# Altium PCB PCB.PcbDoc
Units mil, origin at the board's own origin, x right, y up, seen from the top; angles counter-clockwise.
Board outline 2657.48 x 2066.93 mil, 2 copper layers (Top Layer, Bottom Layer); 47 components, 21 nets, 148 pads, 57 vias.
Unrouted connection lines stored in the file: 1.
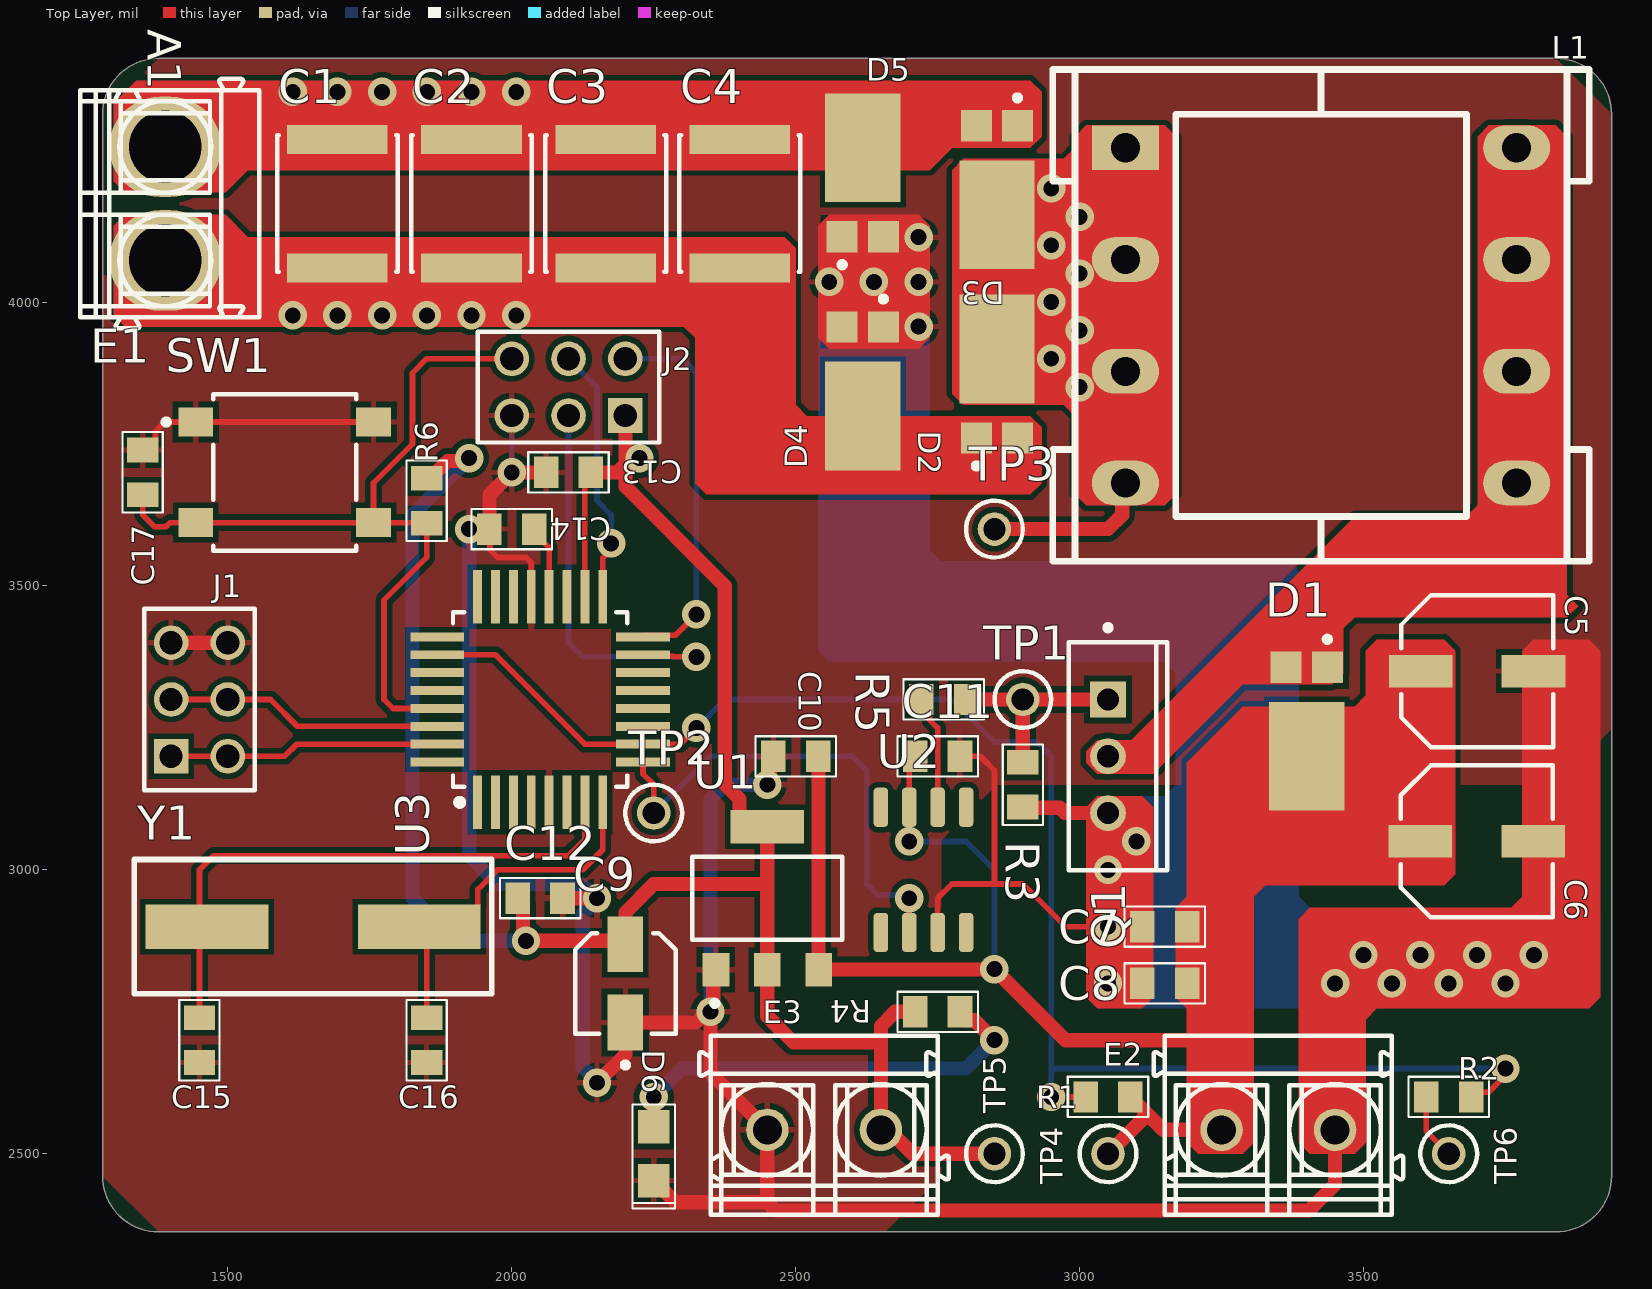
[diagram p0: Top Layer view]
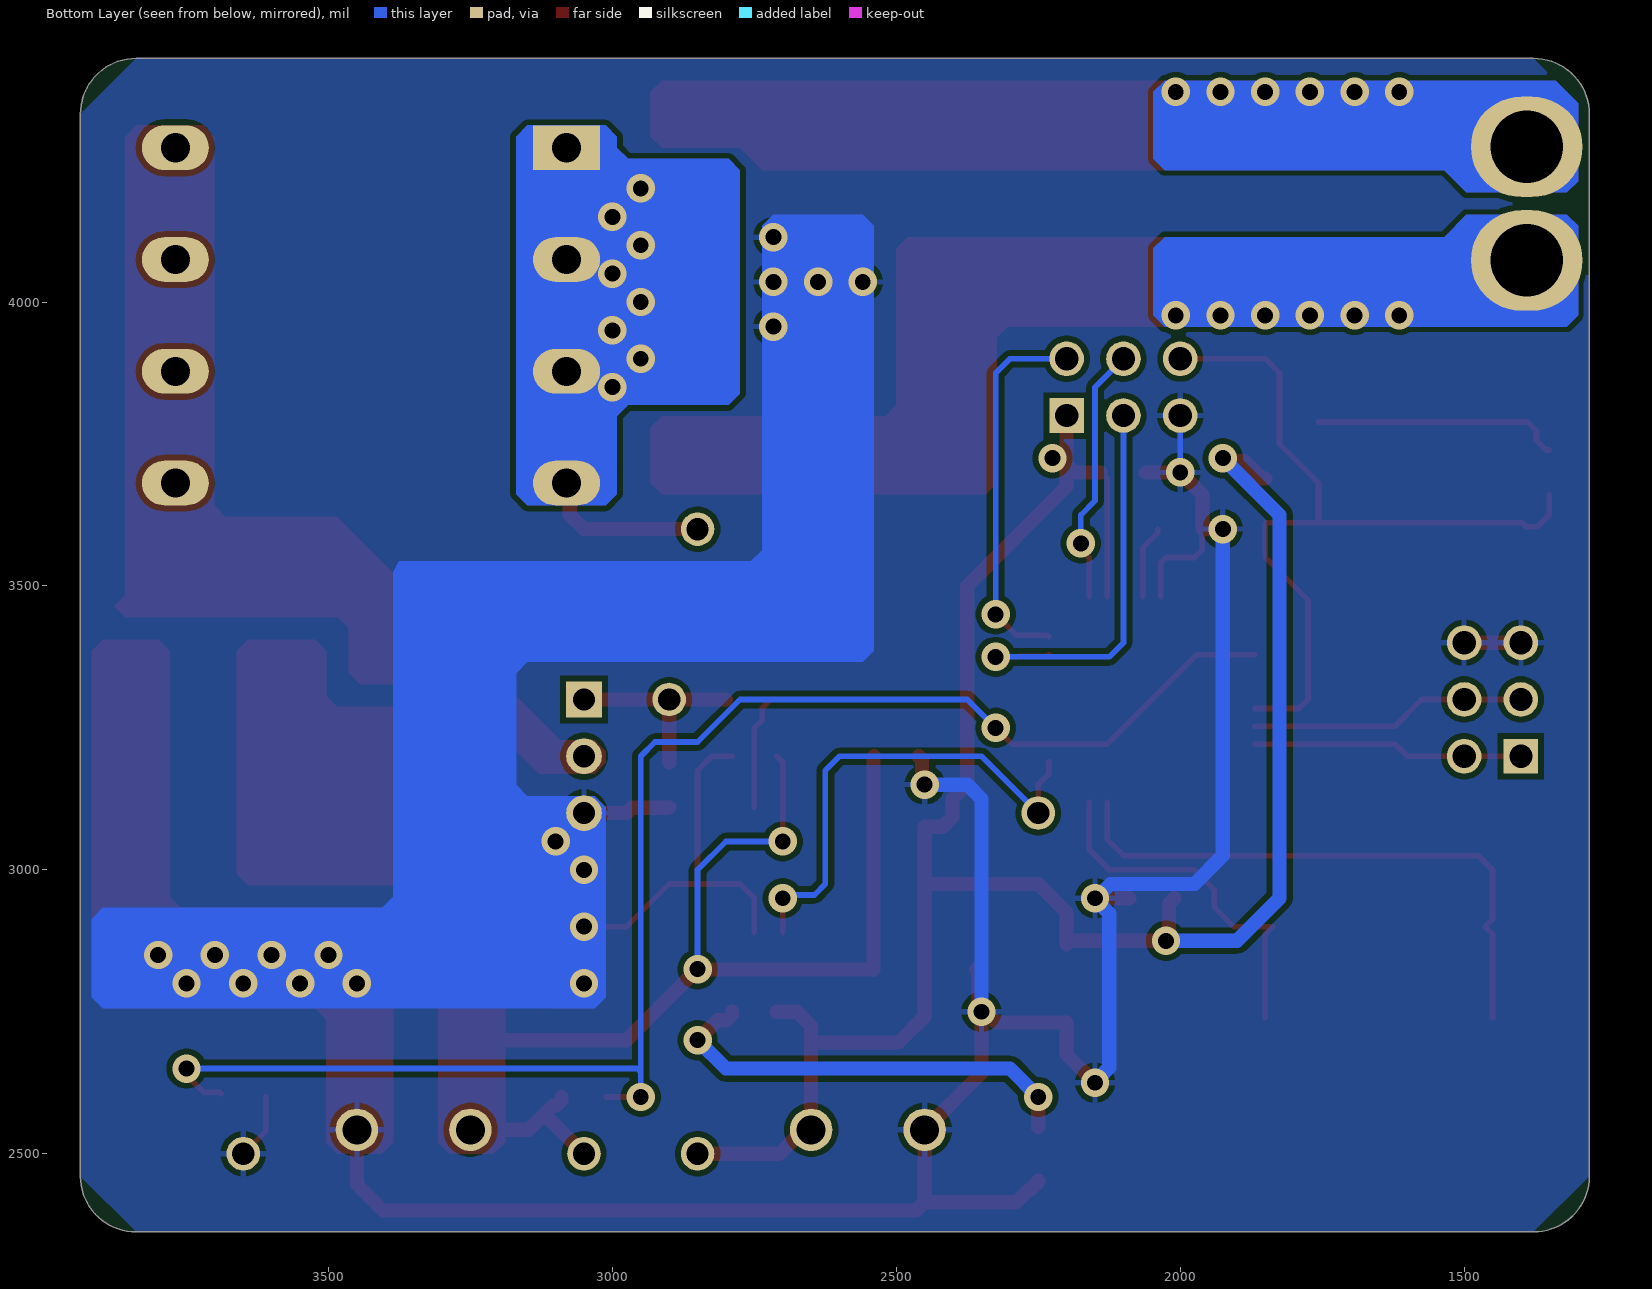
[diagram p1: Bottom Layer view, seen from below]

## Layer stack, top to bottom
Top Solder: solder mask 0.4, Solder Resist, Dk 3.5
Top Layer: signal copper 1.4
Dielectric 1: dielectric 12.6, FR-4, Dk 4.8
Bottom Layer: signal copper 1.4
Bottom Solder: solder mask 0.4, Solder Resist, Dk 3.5

## Board outline
1377.95,2362.2 cw(c1377.95,2460.63) 1279.53,2460.63 1279.53,4330.71 cw(c1377.95,4330.71) 1377.95,4429.13 3838.58,4429.13 cw(c3838.58,4330.71) 3937.01,4330.71 3937.01,2460.63 cw(c3838.58,2460.63) 3838.58,2362.2

## Design rules (kind name [scope] priority, off if disabled: settings)
Clearance [All] p1: gap=10 ignorepadtopadclearanceinfootprint=FALSE except(0: Arc-Hole Track-Hole SMDPad-Hole THPad-Hole Via-Hole Fill-Hole Poly-Hole Region-Hole Text-Hole)
HoleSize [All] p1: absolutevalues=TRUE maxlimit=1000 minlimit=1 maxpercent=80.000 minpercent=20.000
PlaneClearance [All] p1: clearance=50
PolygonConnect [All] p1: connectstyle=Relief reliefconductorwidth=10 reliefentries=4 polygonreliefangle="90 Angle" airgapwidth=10
RoutingVias [All] p1: holewidth=28 width=50 viastyle="Through Hole" minholewidth=28 minwidth=50 maxholewidth=28 maxwidth=50
SolderMaskExpansion [All] p1: expansion=4 istentingtop=FALSE
Width [All] p1: maxlimit=100 minlimit=8 preferedwidth=10 minimp=50.000000 maximp=50.000000 favimp=50.000000
28 further rules are at their usual default settings.

## Classes and differential pairs
component class P_IN: C1 C2 C3 C4 C5 C6 C7 C8 C9 C10 C11 D1 D2 D3 D4 D5 D6 E1 E2 E3 L1 Q1 R1 R2 R3 R4 R5 TP1 TP2 TP3 TP4 TP5 TP6 U1 U2
component class control: C12 C13 C14 C15 C16 C17 J1 J2 R6 SW1 U3 Y1

## Components (designator, comment, footprint, x,y, rotation, side; value= is the part's Value field where it differs from the comment)
C1 "150nF" FP-C5750-230-0_4-MFG 1692.91,4173.23 r90 top
C2 "150nF" FP-C5750-230-0_4-MFG 1929.13,4173.23 r90 top
C3 "18nF" FP-C5750-230-0_4-MFG 2165.35,4173.23 r90 top
C4 "18nF" FP-C5750-230-0_4-MFG 2401.57,4173.23 r90 top
C5 "100u" CAPAE7067X55L 3700,3350 r0 top
C6 "100u" CAPAE7067X55L 3699.41,3050 r0 top
C7 "100nF" "0805 CAP" 3150,2900 r180 top
C8 "100nF" "0805 CAP" 3150,2800 r180 top
C9 "10uF" FP-SB-MFG 2200,2800 r90 top
C10 "100nF" "0805 CAP" 2500,3200 r180 top
C11 "100nF" "0805 CAP" 2750,3200 r0 top
C12 "100nF" "0805 CAP" 2050,2950 r0 top
C13 "100nF" "0805 CAP" 2100,3700 r180 top
C14 "100nF" "0805 CAP" 2000,3600 r180 top
C15 "100nF" "0805 CAP" 1450,2700 r270 top
C16 "100nF" "0805 CAP" 1850,2700 r270 top
C17 "100nF" "0805 CAP" 1350,3700 r90 top
D1 "SDT5H100P5-7" DIOD-POWERDI5-3_V 3400,3244.33 r270 top
D2 "SDT5H100P5-7" DIOD-POWERDI5-3_V 2854.33,3872.99 r90 top
D3 "SDT5H100P5-7" DIOD-POWERDI5-3_V 2854.33,4197.87 r270 top
D4 "SDT5H100P5-7" DIOD-POWERDI5-3_V 2618.11,3843.54 r270 top
D5 "SDT5H100P5-7" DIOD-POWERDI5-3_V 2618.11,4227.32 r90 top
D6 "LTST-C170KGKT" "0805 LED" 2250,2500 r270 top
E1 "1760490000" PM_5_08_90_02#1 1397.64,4173.23 r270 top
E2 "1760490000" PM_5_08_90_02#2 3350,2550 r0 top
E3 "1760490000" PM_5_08_90_02#2 2550,2550 r0 top
J1 "SSW-103-01-T-D" SMTC-SSW-103-01-X-D 1400,3200 r90 top
J2 "SSW-103-01-T-D" SMTC-SSW-103-01-X-D 2200,3800 r180 top
L1 "Inductor" EFD20 3425.2,3976.38 r0 top
Q1 "IPP80N04S4-04" INF-PG-TO220-3-1 3050,3200 r0 top
R1 "18k" "0805 RES" 3050,2600 r0 top
R2 "1k" "0805 RES" 3650,2600 r0 top
R3 "10k" "0805 RES" 2900,3150 r90 top
R4 "18k" "0805 RES" 2750,2750 r180 top
R5 "6R2" "0805 RES" 2760.63,3300 r0 top
R6 "10k" "0805 RES" 1850,3650 r90 top
SW1 "B3S-1000P" FP-B3S-1000P-MFG 1600,3700 r0 top
TP1 "5003" TP_TH 2900,3300 r0 top
TP2 "5003" TP_TH 2250,3100 r0 top
TP3 "5003" TP_TH 2850,3600 r0 top
TP4 "5003" TP_TH 3050,2500 r0 top
TP5 "5003" TP_TH 2850,2500 r0 top
TP6 "5003" TP_TH 3650,2500 r0 top
U1 "LD1117S33CTR" FP-SOT-223-0046067_14-MFG 2450,2950 r90 top
U2 "FAN3227" SOIC-8 2700,3000 r90 top
U3 "ATmega328PB MCU" "32 - TQFP" 2050,3300 r90 top
Y1 "8M" HC49-US 1650,2900 r0 top

## Footprints (in the part's own frame and the unit in brackets; to place one, negate y for a bottom-side part, rotate by r counter-clockwise, add the part's x,y. Pads: shape width x height; smd on the part's side, far side on the other; paste and mask are expansions set on the pad)
"32 - TQFP" [mm]
  rect 2.4x0.4 smd: 1(-4.6,2.8) 2(-4.6,2) 3(-4.6,1.2) 4(-4.6,0.4) 5(-4.6,-0.4) 6(-4.6,-1.2) 7(-4.6,-2) 8(-4.6,-2.8) 17(4.6,-2.8) 18(4.6,-2) 19(4.6,-1.2) 20(4.6,-0.4) 21(4.6,0.4) 22(4.6,1.2) 23(4.6,2) 24(4.6,2.8)
  rect 0.4x2.4 smd: 9(-2.8,-4.6) 10(-2,-4.6) 11(-1.2,-4.6) 12(-0.4,-4.6) 13(0.4,-4.6) 14(1.2,-4.6) 15(2,-4.6) 16(2.8,-4.6) 25(2.8,4.6) 26(2,4.6) 27(1.2,4.6) 28(0.4,4.6) 29(-0.4,4.6) 30(-1.2,4.6) 31(-2,4.6) 32(-2.8,4.6)
  silkscreen extent -4.74,-3.9 3.9,3.9, body extent -4.5,-4.5 4.5,4.5, height 1.3
"0805 CAP" [mm] "http://www.digikey.co.nz/Web%20Export/Supplier%20Content/Vishay_8026/PDF/VishayBeyschlag_SolderPad.pdf?redirected=1 with dimension G modified by +0.25mm"
  rect 1.1x1.4 smd: 1(-1,0) 2(1,0)
  silkscreen extent -1.8,-0.9 1.8,0.9, body extent -1.04,-0.66 1.04,0.66, height 0.61
"0805 LED" [mm] "RED AS AlGaAs SMD LED, Body; 2mm x 1.25 mm (LxW)"
  rect 1.5x1.4 smd: 1(-1.2,0) 2(1.2,0)
  silkscreen extent -2.2,-0.95 2.45,0.95, body extent -1,-0.63 1,0.63, height 1.1
"0805 RES" [mm] "http://www.digikey.co.nz/Web%20Export/Supplier%20Content/Vishay_8026/PDF/VishayBeyschlag_SolderPad.pdf?redirected=1 with dimension G modified by +0.25mm"
  rect 1.1x1.4 smd: 1(-1,0) 2(1,0)
  silkscreen extent -1.8,-0.9 1.8,0.9, body extent -1.04,-0.66 1.04,0.66, height 0.61
CAPAE7067X55L [mm] "Aluminum Electrolytic Capacitor, Body 6.80x6.80x5.50mm, IPC High Density"
  rect 2.85x1.45 smd: 1(-2.525,0) 2(2.525,0)
  silkscreen extent -3.4,-3.4 3.4,3.4, body extent -3.5,-3.4 3.5,3.4, height 5.5
DIOD-POWERDI5-3_V [mm] "SMD, 3-Leads, Body 3.975x5.375mm, Pitch 1.84mm"
  rect 1.4x1.39 smd: 1(-2.856,0.92) 2(-2.856,-0.92)
  rect 4.86x3.36 smd: 3(1.126,0)
  silkscreen extent -4.23,0.8 -3.98,1.05, body extent -2.69,-1.99 2.69,1.99, height 1.15
EFD20 [mm]
  rect 3x2 hole 1.3: 1(-8.75,7.5)
  oval 3x2 hole 1.3: 2(-8.75,2.5) 3(-8.75,-2.5) 4(-8.75,-7.5) 5(8.75,-7.5) 6(8.75,-2.5) 7(8.75,2.5) 8(8.75,7.5)
  silkscreen extent -12,-11 12,11
FP-B3S-1000P-MFG [mm]
  rect 1.55x1.3 smd paste+0 mask+0: 1(-3.975,2.25) 2(3.975,2.25) 3(-3.975,-2.25) 4(3.975,-2.25)
  silkscreen extent -5.42,-3.5 3.2,3.5, body extent -4.85,-3.6 4.85,3.6, height 0.25
FP-C5750-230-0_4-MFG [mm]
  rect 1.3x4.5 smd paste+0 mask+0: 1(-2.875,0) 2(2.875,0)
  silkscreen extent -3.05,-2.7 3.05,2.7, body extent -3.62,-2.8 3.62,2.8, height 0.25
FP-SB-MFG [mm]
  rect 2.5x1.6 smd paste+0 mask+0: 1(-1.75,0) 2(1.75,0)
  silkscreen extent -3.77,-2.25 2.25,2.25, body extent -3.25,-2.5 3.25,2.5, height 0.25
FP-SOT-223-0046067_14-MFG [mm]
  rect 1.5x1.2 smd paste+0 mask+0: 1(-3.2,2.3) 2(-3.2,0) 3(-3.2,-2.3)
  rect 1.5x3.3 smd paste+0 mask+0: 4(3.2,0)
  silkscreen extent -4.82,-3.35 1.85,3.35, body extent -4.05,-3.45 4.05,3.45, height 0.25
HC49-US [mm] "20Mhz Crystal"
  rect 5.5x2 smd: 1(-4.75,0) 2(4.75,0)
  silkscreen extent -8,-3 8,3, body extent -4.77,-2.4 4.79,2.4, height 3.8
INF-PG-TO220-3-1 [mm] "FM, 3-Leads, Body 10x4.4mm, Pitch 2.54mm"
  rect 1.6x1.6 hole 1: 1(0,2.54)
  round 1.6 hole 1: 2(0,0) 3(0,-2.54)
  silkscreen extent -1.75,-5.1 2.65,5.87, body extent -1.75,-5.1 2.65,5.1, height 20.7
PM_5_08_90_02#1 [mm] "PM 5.08/02/90 3.5"
  oval 4.5x5 hole 3.25: A1(-2.54,-0.2) A2(2.54,-0.2)
  silkscreen extent -5.58,-4 5.58,4, body extent -5.58,-4 5.58,4, height 10.01
PM_5_08_90_02#2 [mm] "PM 5.08/02/90 3.5"
  round 1.9 hole 1.3: A1(-2.54,-0.2) A2(2.54,-0.2)
  silkscreen extent -5.58,-4 5.58,4, body extent -5.58,-4 5.58,4, height 10.01
SMTC-SSW-103-01-X-D [mm] "SQ Post Socket, 2x3 Pins, Vertical, 2.54mm Pitch, Female"
  rect 1.55x1.55 hole 1.04: 1(0,0)
  round 1.55 hole 1.04: 2(0,-2.54) 3(2.54,0) 4(2.54,-2.54) 5(5.08,0) 6(5.08,-2.54)
  silkscreen extent -1.53,-3.74 6.61,1.2, body extent -1.52,-3.75 6.6,1.21, height 8.51
SOIC-8 [mm]
  rrect50% 1.75x0.65 smd: 1(-2.8,1.27) 2(-2.8,0) 3(-2.8,-1.27) 4(-2.8,-2.54) 5(2.8,-2.54) 6(2.8,-1.27) 7(2.8,0) 8(2.8,1.27)
TP_TH [mm] "Test Point, Through Hole, Dia 2.54mm"
  round 1.5 hole 1: 1(0,0)
  silkscreen extent -1.27,-1.27 1.27,1.27, body extent -1.27,-1.27 1.27,1.27, height 4.57

## Part data
C1 C2 C3 C4: library part CMP-08246-002717-1, "Multilayer Ceramic Capacitors 10uF ±10% 50V X5R SMD 2220", Capacitance=10uF, Case Code (Imperial)=2220, Case Code (Metric)=5750, Dielectric=X5R, Dielectric Material=Ceramic, Max Operating Temperature=85°C, Min Operating Temperature=-55°C, Package Quantity=1, Tolerance=10%, Voltage=50V, Case/Package=2220, Construction=Flat, Depth=5mm, Height=2.3mm, Lead Free="Lead Free", Length=5.7mm, Mount="Surface Mount", Number of Pins=2, Packaging="Tape and Reel", Radiation Hardening=No, REACH SVHC="No SVHC", Resistor Type=Ceramic, RoHS Compliant=Yes, Series=C, Termination=SMD/SMT, Thickness=0.098inch, Voltage Rating=50V, Voltage Rating (DC)=50V, Weight=0.016932oz, Width=0.197inch
C5 C6: library part CMP-2000-07374-1, "Aluminum Electrolytic Capacitor, 100 uF, +/- 20%, 16 V, -40 to 85 degC, 2-Pin SMD, RoHS, Tape and Reel", Capacitance=100µF, Case Size/Dimension=Ø6.3x5.4mm, Manufacturer=Nichicon, Operating Temp-Max=85°C, Package Description="2-Pin Surface Mount Device, Body 6.6 x 6.6 mm", Package Reference=CAPAE7067X55, Rated Voltage=16V, Datasheet URL=http://nichicon-us.com/english/products/pdfs/e-uwx.pdf, Datasheet Version=08/2015, Manufacturer URL=http://www.nichicon.co.jp/english/, Mounting Technology=SurfaceMount, Type=Can
C7 C8 C10 C11 C12 C13 C14 C15 C16 C17: library part CerCap_SMT_0805, "SMT ceramic capacitor 0805 size"
C9: library part CMP-05427-000070-1, "CAP ALUM 1UF 20% 50V SMD", Capacitance=1uF, Case/Package=Radial, Dielectric Material=Aluminium, Leakage Current=3uA, Max Operating Temperature=85°C, Min Operating Temperature=-40°C, Package Quantity=2000, Ripple Current=10mA, Tolerance=20%, Voltage=50V, Construction=Cylindrical, Contact Plating=Tin, Diameter=4mm, Height=5.4mm, Height - Seated (Max)=0.213inch, Lead Free="Lead Free", Lead Length=1.8mm, Lead Pitch=1mm, Length=5.5mm, Life (Hours)=2000Hour, Mount="Surface Mount", Number of Pins=2, Packaging="Tape and Reel", Polarity=Polar, Radiation Hardening=No, REACH SVHC="No SVHC", Ripple Current (AC)=10mA, RoHS Compliant=Yes, Series=S, Termination=SMD/SMT, Voltage Rating=50V, Voltage Rating (DC)=50V, Width=4.3mm
D1 D2 D3 D4 D5: library part CMP-2000-07476-1, "Schottky Barrier Rectifier, 60 V, 7 A, -65 to 150 degC, 3-Pin SMD, RoHS, Tape and Reel", Average Rectified Current=7A, Case\/Package=SMD/SMT, Forward Voltage=620mV, Manufacturer="Diodes Inc", Max Forward Surge Current (Ifsm)=275A, Max Operating Temperature=150degC, Max Repetitive Reverse Voltage (Vrrm)=60V, Min Operating Temperature=-65degC, Package Description="3-Pin Surface Mount Device, Body 3.975 x 5.375 mm, Pitch 1.84 mm", Package Quantity=5000, Package Reference=POWERDI5-3, Peak Reverse Current=200uA, Contact Plating=Matte, Current Rating=7A, Datasheet URL=https://www.diodes.com/assets/Datasheets/ds30477.pdf, Datasheet Version="Rev. 13-2, 10/2012", Element Configuration=CommonAnode, Forward Current=7A, Height=1.15mm, Lead Free=LeadFree, Length=4.05mm, Manufacturer URL=http://www.diodes.com/, Mount=SurfaceMount, Mounting Technology=SurfaceMount, Number of Pins=5, Output Current=7A, Packaging=TapeandReel, Peak Non-Repetitive Surge Current=275A, Polarity=Standard, Radiation Hardening=No, REACH SVHC=NoSVHC, Reverse Voltage (DC)=60V, RoHSCompliant=true, Voltage Rating (DC)=60V, Weight=0.003386oz, Width=5.45mm
D6: library part LED_SMT_0805, "SMT LED 0805 size", Color=Green, Current - Test=20mA, Lens Color=Colorless, Manufacturer="Lite-On Inc.", Millicandela Rating=35mcd, Package / Case="0805 (2012 Metric)", Supplier Part Number 1=160-1414-1-ND, Voltage - Forward (Vf) (Typ)=2V, Category=Optoelectronics, ComponentLink1Description=http://optoelectronics.liteon.com/upload/download/DS22-2000-073/LTST-C170KGKT.pdf, ComponentLink1URL=http://optoelectronics.liteon.com/upload/download/DS22-2000-073/LTST-C170KGKT.pdf, Features=-, Height (Max)=1.10mm, Lens Style/Size="Rectangle with Flat Top, 1.40mm x 1.25mm", Lens Transparency=Clear, Manufacturer Part Number=LTST-C170KGKT, Mounting Type="Surface Mount", Packaging="Cut Tape (CT)", Part Status=Active, Pricing 1="1=0.62, 10=0.459, 25=0.338, 100=0.2415, 250=0.16416, 500=0.14486, 1000=0.11347 (NZD)", RoHS="RoHS Compliant", Size / Dimension="2.00mm L x 1.25mm W", Stock 1=503069, Supplier 1=Digi-Key, Viewing Angle=130°, Wavelength - Dominant=571nm, Wavelength - Peak=574nm
E1 E2 E3: library part CMP-1559-01627-1, "OMNIMATE Signal - series PM", Colour=Orange, Manufacturer=Weidmueller, Rated_current_use_group_B_UL_1059="15 A", Rated_voltage_for_surge_voltage_class_pollution_degree_II_2="600 V", Rated_voltage_use_group_B_UL_1059="300 V", UL_94_flammability_rating=V-0, ComponentLink1Description="Manufacturer URL", ComponentLink1URL=http://www.weidmueller.com/, ComponentLink2Description="URL Link1", ComponentLink2URL=http://catalog.weidmueller.com/catalog/Start.do?localeId=en&ObjectID=1760490000, Contact_material=Cu-Leg, Contact_surface=tinned, Insulating_material="Wemid (PA)", Mounting_onto_the_PCB="Solder connection", No_of_poles=2, PackageReference=PM_5_08_90_02, Packaging=Box, PartNumber=1760490000, Pitch_inch="0,2 inch", Pitch_mm="5,08 mm", Qty="500 PCS", Revision=V1, Short_text_for_material="PM 5.08/02/90 3.5SN OR BX", Side_termination_characteristic="closed side", Solder_pin_length_mm="3,5 mm", Solid_max_H05_07_V_U="2,5 mm²", Solid_min_H05_07_V_U="0,13 mm²", Wire_cross_section_AWG_max_UL_1059="AWG 14", Wire_cross_section_AWG_min_UL_1059="AWG 26"
J1 J2: library part CMP-1023-00332-1, "SQ Post Socket, Through-hole, Vertical, -55 to 105 degC, 2.54 mm Pitch, 6-Pin, Female, RoHS", Manufacturer=Samtec, Temperature Range="-55 to 105 degC", ComponentLink1Description="Manufacturer URL", ComponentLink1URL=http://www.samtec.com, ComponentLink2Description=Datasheet, ComponentLink2URL=http://www.samtec.com/documents/webfiles/pdf/SSW_TH.PDF, ComponentLink3Description="Package Specification", ComponentLink3URL=http://www.samtec.com/documents/webfiles/cpdf/SSW-1XX-XX-XXX-X-XX-XXX-XX-MKT.pdf, DatasheetVersion=F-214, Mounting Technology=Through-hole, Orientation=Vertical, PackageDescription="Assembly, Socket Strip .016 X .031 Tail", PackageReference=SSW-103-01-X-D, PackageVersion="CA, 6/1987", PartNumber=SSW-103-01-T-D, Pitch="2.54 mm", RoHS=True
L1: library part "Inductor EFD20", "Inductor with core"
Q1: library part CMP-1138-00045-1, "OptiMOS-T2 Power-Transistor, 40 V VDS, 80 A ID, PG-TO220-3-1, Tube, Green", Manufacturer=Infineon, ComponentLink1Description="Manufacturer URL", ComponentLink1URL=http://www.infineon.com/, ComponentLink2Description=Datasheet, ComponentLink2URL=http://www.infineon.com/dgdl/IPP_B_I80N04S4-04_DS_1_0.pdf?folderId=db3a304412b407950112b42b75b74520&fileId=db3a304328c6bd5c01291c71d4085dfa&location=en.Products.Automotive_ICs.Automotive_MOSFETs.Single__N-Channel_40V_MOSFETs.DATASHEET.IPP_B_I80N04S4-04_DS_, ComponentLink3Description="Package Specification", ComponentLink3URL=http://www.infineon.com/dgdl/BTS117_DS_14.pdf?folderId=db3a30431400ef68011421b54e2e0564&fileId=db3a30433a747525013abff8302d549c&location=en.Products.Automotive_ICs.Smart_High-_and_Low-Side_Switches.HITFET___TEMPFET__-_Smart_Low-Side_Switches.DATASHEET.BTS1, DatasheetVersion="Rev. 1.0", Green=TRUE, Halogen-free=TRUE, ID (max)="80 A", IDpuls (max)="320 A", Mounting Technology="Through Hole", PackageDescription="3-Pin Plastic (Green) Transistor Single Outline Package, 10 x 9.25 mm Body, 2.54 mm Pitch", PackageReference=PG-TO220-3-1, PackageVersion=Jul-12, Packing=Tube, PartNumber=IPP80N04S4-04, Ptot (max)="71 W", QG="33 nC", RDS (on) (max) (@10V)="4.6 mOhm", RthJC (max)="2.1 K/W", Technology=OptiMOS-T2, VDS (max)="40 V", VGS(th) (max)="4 V", VGS(th) (min)="2 V"
R1 R2 R3 R4 R5 R6: library part Res_SMT_0805, "0805 resistor", ComponentLink1Description=https://nz.mouser.com/datasheet/2/315/AOA0000C304-1149620.pdf, LatestRevisionDate=17-Jul-2002, LatestRevisionNote="Re-released for DXP Platform.", PackageReference=AXIAL-0.4, Published=8-Jun-2000, Publisher="Altium Limited"
SW1: library part CMP-08834-000008-1, "SWITCH TACTILE SPST-NO 0.05A 24V", Contact Current Rating=50mA, Contact Resistance=100mR, Max Operating Temperature=70°C, Max Voltage Rating (DC)=24V, Min Operating Temperature=-25°C, Operating Force=1.57N, Package Quantity=1, Ratings=IP67, Actuator Length=0.8mm, Actuator Type=Standard, Contact Material=Bronze, Contact Plating=Silver, Current Rating=50mA, Depth=9mm, Electrical Life=500000Cycles, Height=3.65mm, Illumination Type=Non-Illuminated, Lead Free="Lead Free", Length=6.6mm, Max Current Rating=50mA, Mechanical Life=500000Cycles, Mount="Surface Mount", Number of Poles=1, Orientation=Straight, Packaging="Tape and Reel", Radiation Hardening=No, REACH SVHC="No SVHC", Switch Function=Off-Mom, Switch Travel=0.25mm, Termination="Gull Wing", Throw Configuration=SPST, Voltage Rating (DC)=24V, Weight=0.010582oz, Width=6mm
TP1 TP2 TP3 TP4 TP5 TP6: library part TestPoint, "Test Point, Orange, 1-Pin THD, RoHS", Forward Current="3 A", Forward Voltage="1.08 V", Max Operating Temperature="150 degC", Max Surge Current="80 A", Min Operating Temperature="-65 degC", Package Quantity=500, Peak Reverse Current="600 uA", ComponentLink1Description="Manufacturer URL", ComponentLink1URL=http://www.keyelco.com/, ComponentLink2Description=Datasheet, ComponentLink2URL=http://keyelco.com/userAssets/file/M65p56.pdf, DatasheetVersion=Jun-15, Diameter="5.3 mm", Height="0.25 inch", Length="9.5 mm", Mount="Through Hole", PackageDescription="1-Pin Through Hole Device, Dia 2.54 mm", PackageReference=5003, Packaging=Bulk, Pins=2, Radiation Hardening=No, REACH SVHC="No SVHC", RoHSCompliant=true, Weight="0.01 lb", Width="0.25 inch"
U1: library part CMP-0244-00307-2, "IC REG LINEAR 3.3V 800MA SOT223", Case/Package=SOT-223, Dropout Voltage=1.1V, Input Bias Current=5mA, Max Input Voltage=15V, Max Operating Temperature=125°C, Max Output Current=1.3A, Max Output Voltage=3.3V, Max Power Dissipation=12W, Min Input Voltage=5.3V, Min Operating Temperature=-40°C, Output Current=950mA, Output Voltage Accuracy=1%, Package Quantity=1, Quiescent Current=10mA, Accuracy=1%, Contact Plating=Tin, Height=1.8mm, Lead Free="Lead Free", Length=6.5mm, Max Supply Voltage=15V, Min Output Voltage=3.3V, Min Supply Voltage=3.3V, Mount="Surface Mount", Nominal Output Voltage=3.3V, Number of Outputs=1, Number of Pins=4, Number of Regulators=1, Number of Terminals=4, Output Type=Fixed, Output Voltage=3.3V, Packaging="Tape and Reel", Polarity=Positive, Power Dissipation=12W, Radiation Hardening=No, REACH SVHC="No SVHC", Termination=SMD/SMT, Weight=0.01lb, Width=3.5mm
U3: library part ATmega328PB_SMT_TQFP32, "IC MCU 8BIT 32KB FLASH 32TQFP", Manufacturer=Atmel, Manufacturer Part Number=ATMEGA328PB-AN, Operating Temperature="-40°C ~ 105°C (TA)", Package / Case=32-TQFP, Supplier Device Package="32-TQFP (7x7)", Supplier Part Number 1=ATMEGA328PB-AN-ND, Voltage - Supply (Vcc/Vdd)="1.8 V ~ 5.5 V", Category="Integrated Circuits (ICs)", ComponentLink1Description=http://www.atmel.com/images/atmel-42397-8-bit-avr-microcontroller-atmega328pb_datasheet.pdf, ComponentLink1URL=http://www.atmel.com/images/atmel-42397-8-bit-avr-microcontroller-atmega328pb_datasheet.pdf, Connectivity="I²C, SPI, UART/USART", Core Processor=AVR, Core Size=8-Bit, Data Converters="A/D 8x10b", EEPROM Size="1K x 8", Number of I/O=27, Oscillator Type=Internal, Packaging=Tray, Part Status=Active, Peripherals="Brown-out Detect/Reset, POR, PWM, WDT", Pricing 1="1=2.74, 10=2.448, 25=2.2032, 100=2.0074, 250=1.81152, 500=1.62548, 1000=1.37088 (USD)", Program Memory Size="32KB (16K x 16)", Program Memory Type=FLASH, RAM Size="2K x 8", RoHS="RoHS Compliant", Speed=20MHz, Stock 1=366, Supplier 1=Digi-Key
Y1: library part TXC9C-16_XTAL_SMT, "9C-16.000MAAJ-T crystal 16.0000MHZ 18PF SMD", Frequency Stability=±30ppm, Load Capacitance=18pF, Manufacturer="TXC CORPORATION", Manufacturer Part Number=9C-16.000MAAJ-T, Operating Mode=Fundamental, Operating Temperature="-20°C ~ 70°C", Package / Case=HC-49/US, Ratings=-, Supplier Part Number 1=887-1059-1-ND, Category="Crystals, Oscillators, Resonators", ComponentLink1Description=http://www.txccorp.com/download/products/quartz_crystals/2015TXC_9C_32.pdf, ComponentLink1URL=http://www.txccorp.com/download/products/quartz_crystals/2015TXC_9C_32.pdf, Frequency Tolerance=±30ppm, Height - Seated (Max)="0.161\" (4.10mm)", Mounting Type="Surface Mount", Packaging="Cut Tape (CT)", Part Status=Active, Pricing 1="1=0.75, 10=0.628, 50=0.5656, 100=0.5026, 500=0.47744 (NZD)", RoHS="RoHS Compliant", Size / Dimension="0.449\" L x 0.189\" W (11.40mm x 4.80mm)", Stock 1=11514, Supplier 1=Digi-Key, Type="MHz Crystal"

## Via types
v1: diameter 50, hole 28, Top Layer to Bottom Layer, 57 vias

## Nets (pads, with @x,y where several pads share a name; then routed paths per layer and width w, separated by ;. In a path a pad name is that pad's centre, name@x,y a point inside that pad or via, vN(x,y) a via of type N, cw(c..) or ccw(c..) an arc to the next point about the centre after c; other vN are vias at no path point)
3v3: C9.2 C12.1 C13.1 E3.A2 J2.1 R4.2 R6.2 TP5.1 U1.2 U1.4 U3.4 U3.18 | length 3901.9
  Top Layer w10: U3.18 2128.74,3689.37 C13.1
  Top Layer w25: R6.2 1855.91,3689.37 1886.75,3720.22 1920.22,3720.22 v1(1925,3725) ; C12.1 2019.78,2940.85 2019.78,2886.98 2025,2881.76 v1(2025,2875) 2193.9,2875 C9.2 2200,2925 2250,2975 2450,2975 ; C13.1 2185.36,3700 2200,3714.64 ; v1@2200,3725 J2.1 ; v1(2225,3725) 2220.22,3720.22 2205.57,3720.22 2200,3714.64 ; R4.2 2675,2750 2650,2725 2650,2696.06 ; TP5.1 2705.6,2500 2663.48,2542.13 E3.A2 2650,2696.06 ; 2200,3714.64 2200,3675 2375,3500 2375,3150.98 2401.24,3124.74 2401.24,3093.01 2418.27,3075.98 U1.4 2450,2975 ; 2450,2975 U1.2 2450,2742.13 2496.06,2696.06 2650,2696.06
  Bottom Layer w25: v1(1925,3725) 1825,3625 1825,2950 1900,2875 v1(2025,2875)
boost_pwm: TP2.1 U2.2 U3.9 | length 870
  Top Layer w10: U3.9 2231.1,3168.9 2250,3150 TP2.1 ; U2.2 v1(2700,2950)
  Bottom Layer w10: TP2.1 2350,3200 2600,3200 2625,3175 2625,2975 2644.22,2955.78 2694.22,2955.78 v1(2700,2950)
BoostDriver: Q1.1 R3.2 R5.2 TP1.1 | length 360.6
  Top Layer w25: R5.2 TP1.1 ; R3.2 TP1.1 ; Q1.1 TP1.1
GND: C5.2 C6.2 C7.2 C8.2 C9.1 C10.2 C11.2 C12.2 C13.2 C14.2 C15.2 C16.2 C17.2 D4.1 D4.2 D5.1 D5.2 D6.2 E2.A2 E3.A1 J1.5 J1.6 J2.5 Q1.3 R2.1 R3.1 SW1.1 SW1.2 TP6.1 U1.1 U2.3 U3.5 U3.21 | length 5845.5
  Top Layer w10: C17.2 1355.91,3739.37 1372.56,3756.02 1372.56,3772.56 1388.58,3788.58 SW1.1 SW1.2 ; C14.2 1961.7,3598.93 1961.7,3563.3 1975,3550 2025,3550 2034.25,3540.75 U3.21 ; v1(2716.54,4114.17) v1@2736.22,4114.17 ; U2.3 2750,2950 2775,2975 2850,2975 ; C11.2 2825,3200 2850,3175 2850,2975 ; v1(3050,2900) 2975,2900 2900,2975 2850,2975 ; R2.1 3610.63,2539.37 TP6.1
  Top Layer w25: J1.5 J1.6 ; v1(1925,3600) C14.2 1960.63,3660.63 v1(2000,3700) C13.2 ; C12.2 v1(2150,2950) ; v1(2150,2625) 2200,2675 C9.1 2324.34,2731.1 2343.24,2750 v1(2350,2750) ; D6.2 2250,2450.79 2265.06,2435.73 2267.03,2435.73 2288.11,2414.64 2450,2414.64 ; U1.1 2354.72,2819.29 2354.72,2754.72 v1(2350,2750) ; v1(2450,3150) 2454.78,3154.78 2454.78,3194.15 C10.2 ; R3.1 2901.2,3109.43 2965.06,3109.43 2974.49,3100 Q1.3 ; E2.A2 3450,2446.06 3403.94,2400 2464.64,2400 2450,2414.64 ; v1(2350,2750) 2350,2642.13 E3.A1 2450,2414.64
  Bottom Layer w10: v1(2000,3700) J2.5
  Bottom Layer w25: v1(1925,3600) 1925,3025 1975,2975 2122.86,2975 2147.86,2950 v1(2150,2950) 2150,2947.86 2125,2922.86 2125,2652.14 2150,2627.14 v1(2150,2625) ; v1(2350,2750) 2350,3125 2375,3150 v1(2450,3150)
  other v1: 3050,2800 3450,2800 3550,2800 3650,2800 3750,2800 3500,2850 3600,2850 3700,2850 3800,2850 3050,3000 3100,3050 2716.54,3956.69 2559.06,4035.43 2637.8,4035.43 2716.54,4035.43
IPT_IN1: C1.1 C2.1 C3.1 C4.1 D2.1 D2.2 D4.3 E1.A2
  other v1: 1614.17,3976.38 1692.91,3976.38 1771.65,3976.38 1850.39,3976.38 1929.13,3976.38 2007.87,3976.38
IPT_IN2: C1.2 C2.2 C3.2 C4.2 D3.1 D3.2 D5.3 E1.A1
  other v1: 1614.17,4370.08 1692.91,4370.08 1771.65,4370.08 1850.39,4370.08 1929.13,4370.08 2007.87,4370.08
MISO: J2.2 U3.16 | length 670.7
  Top Layer w10: U3.16 2233.98,3413.11 2288.11,3413.11 v1(2325,3450)
  Bottom Layer w10: J2.2 2300,3900 2325,3875 v1(2325,3450)
MOSI: J2.3 U3.15 | length 730.8
  Top Layer w10: U3.15 2233.98,3375.87 2284.13,3375.87 2285,3375 v1(2325,3375)
  Bottom Layer w10: J2.3 2100,3400 2125,3375 v1(2325,3375)
NetC14_1: C14.1 U3.20 | length 129.8
  Top Layer w10: C14.1 2039.37,3594.09 2065.75,3567.72 U3.20
NetD1_1: D1.1 D1.2 L1.5 L1.6 L1.7 L1.8 Q1.2
NetD6_1: D6.1 R4.1 | length 779
  Top Layer w25: D6.1 v1(2250,2600) ; R4.1 2789.37,2744.09 2798.52,2734.94 2815.06,2734.94 v1(2850,2700)
  Bottom Layer w25: v1(2250,2600) 2300,2650 2800,2650 v1(2850,2700)
NetR5_1: R5.1 U2.6 | length 201.7
  Top Layer w10: R5.1 2735.84,3285.42 2735.84,3264.16 2750,3250 U2.6
RST: C17.1 J2.6 R6.1 SW1.3 SW1.4 U3.29 | length 1467
  Top Layer w10: C17.1 1350,3625 1370.86,3604.14 1390.72,3604.14 1397.99,3611.42 SW1.3 SW1.4 ; U3.29 1790.75,3284.25 1775,3300 1775,3475 1850,3550 R6.1 1849.21,3611.42 SW1.4 ; J2.6 1850,3900 1825,3875 1825,3750 1756.5,3681.5 SW1.4
Rx: J1.3 J1.4 U3.30 | length 488.5
  Top Layer w10: J1.3 J1.4 1575,3300 1622.24,3252.76 U3.30
SCK: J2.4 U3.17 | length 456.1
  Top Layer w10: U3.17 2160.24,3549.41 2175,3564.18 v1(2175,3575)
  Bottom Layer w10: J2.4 2150,3850 2150,3650 2175,3625 v1(2175,3575)
Tx: J1.1 J1.2 U3.31 | length 477.7
  Top Layer w10: J1.1 J1.2 1600,3200 1621.26,3221.26 U3.31
Vboost_out: C5.1 C6.1 C7.1 C8.1 C10.1 C11.1 D1.3 E2.A1 R1.2 TP4.1 U1.3 U2.7 | length 1903.4
  Top Layer w10: v1(2700,3050) 2700,3189.37 C11.1
  Top Layer w25: C10.1 2539.96,3199.41 2539.96,2824.61 U1.3 2541.04,2824.51 2849.51,2824.51 v1(2850,2825) 2975,2700 3225,2700 ; TP4.1 3113.53,2563.53 3125.84,2563.53 ; R1.2 3089.37,2594.09 3098.52,2584.94 3104.43,2584.94 3125.84,2563.53 ; E2.A1 3147.24,2542.13 3125.84,2563.53
  Bottom Layer w10: v1(2700,3050) 2800,3050 2850,3000 v1(2850,2825)
Vboost_sense: R1.1 R2.2 U3.10 U3.26 | length 2769.3
  Top Layer w10: U3.26 1971.26,3378.74 2128.74,3221.26 U3.10 2296.26,3221.26 v1(2325,3250) ; v1(2950,2600) R1.1 ; R2.2@3689.37,2605.91 3691.71,2608.25 3720.17,2608.25 3742.35,2630.43 3742.35,2642.35 v1(3750,2650)
  Bottom Layer w10: v1(2325,3250) 2375,3300 2775,3300 2850,3225 2925,3225 2950,3200 2950,2644.14 ; v1(2950,2600) 2950,2644.14 ; v1(3750,2650) 2955.86,2650 2950,2644.14
Vrect_out: D2.3 D3.3 L1.1 L1.2 L1.3 L1.4 TP3.1 | length 293.8
  Top Layer w25: TP3.1 3050,3600 3075,3625 3075,3675.39 L1.4
  other v1: 3000,3850 2950,3900 3000,3950 2950,4000 3000,4050 2950,4100 3000,4150 2950,4200
XTAL1: C15.1 U3.7 Y1.1 | length 1037.6
  Top Layer w10: C15.1 1450,2887.01 Y1.1 1450,2912.99 1450,3000 1475,3025 2100,3025 2128.74,3053.74 U3.7
XTAL2: C16.1 U3.8 Y1.2 | length 647
  Top Layer w10: C16.1 1850,2887.01 Y1.2 1905.91,2900 1940.28,2934.37 1940.28,2965.28 1975,3000 2125,3000 2160.24,3035.24 U3.8
pads on no net: U2.1 U2.4 U2.5 U2.8 U3.1 U3.2 U3.3 U3.6 U3.11 U3.12 U3.13 U3.14 U3.19 U3.22 U3.23 U3.24 U3.25 U3.27 U3.28 U3.32

## Polygon pours and split planes (outlines as drawn)
GND on Top Layer "GND_L01_P001" (solid, remove dead copper, pour order 1): 2854.33,3149.61 2755.91,3051.18 2755.91,2460.63 2657.48,2362.2 1377.95,2362.2 1279.53,2460.63 1279.53,4330.71 1377.95,4429.13 3838.58,4429.13 3937.01,4330.71 3937.01,3248.03 3838.58,3149.61
GND on Bottom Layer "GND_L02_P000" (solid, remove dead copper, pour order 0): 3838.58,2362.2 3937.01,2460.63 3937.01,4330.71 3838.58,4429.13 1377.95,4429.13 1279.53,4330.71 1279.53,2460.63 1377.95,2362.2

## Other copper
Top Layer:
  region net GND: 3031.5,3129.92 3110.24,3129.92 3129.92,3110.24 3129.92,2775.59 3110.24,2755.91 3031.5,2755.91 3011.81,2775.59 3011.81,3110.24
  region net Vboost_out: 3188.98,2952.76 3169.29,2933.07 3169.29,2775.59 3188.98,2755.91 3188.98,2519.69 3208.66,2500 3287.4,2500 3307.09,2519.69 3307.09,2952.76 3326.77,2972.44 3641.73,2972.44 3661.42,2992.13 3661.42,3385.83 3641.73,3405.51 3523.62,3405.51 3503.94,3385.83 3503.94,3307.09 3484.25,3287.4 3287.4,3287.4 3188.98,3188.98
  region net NetD1_1: 3090.55,3169.29 3129.92,3169.29 3169.29,3208.66 3287.4,3326.77 3444.88,3326.77 3464.57,3346.46 3464.57,3425.2 3484.25,3444.88 3858.27,3444.88 3877.95,3464.57 3858.27,3484.25 3858.27,4291.34 3838.58,4311.02 3720.47,4311.02 3700.79,4291.34 3700.79,3641.73 3681.1,3622.05 3484.25,3622.05 3090.55,3228.35 3031.5,3228.35 3011.81,3208.66 3011.81,3188.98 3031.5,3169.29
  region net GND: 3385.83,2913.39 3405.51,2933.07 3759.84,2933.07 3779.53,2952.76 3779.53,3385.83 3799.21,3405.51 3897.64,3405.51 3917.32,3385.83 3917.32,2775.59 3897.64,2755.91 3523.62,2755.91 3503.94,2736.22 3503.94,2519.68 3484.25,2500 3405.51,2500 3385.83,2519.68
  region net Vrect_out: 2775.59,4232.28 2795.28,4251.97 2972.44,4251.97 2992.13,4271.65 2992.13,4291.34 3011.81,4311.02 3149.61,4311.02 3169.29,4291.34 3169.29,3661.42 3149.61,3641.73 3011.81,3641.73 2992.13,3661.42 2992.13,3799.21 2972.44,3818.9 2795.28,3818.9 2775.59,3838.58
  region net GND: 2539.37,4133.86 2559.06,4153.54 2716.54,4153.54 2736.22,4133.86 2736.22,3937.01 2716.54,3917.32 2559.06,3917.32 2539.37,3937.01
  region net IPT_IN1: 2322.83,3937.01 2322.83,3681.1 2342.52,3661.42 2913.39,3661.42 2933.07,3681.1 2933.07,3779.53 2913.39,3799.21 2519.68,3799.21 2500,3818.9 2500,4094.49 2480.32,4114.17 1535.43,4114.17 1496.06,4153.54 1318.9,4153.54 1299.21,4133.86 1299.21,3976.38 1318.9,3956.69 2303.15,3956.69
  region net IPT_IN2: 1338.58,4389.76 1299.21,4350.39 1299.21,4212.6 1318.9,4192.91 1496.06,4192.91 1535.43,4232.28 2736.22,4232.28 2775.59,4271.65 2913.39,4271.65 2933.07,4291.34 2933.07,4370.08 2913.39,4389.76
Bottom Layer:
  region net Vrect_out: 2775.59,4232.28 2795.28,4251.97 2972.44,4251.97 2992.13,4271.65 2992.13,4291.34 3011.81,4311.02 3149.61,4311.02 3169.29,4291.34 3169.29,3661.42 3149.61,3641.73 3011.81,3641.73 2992.13,3661.42 2992.13,3799.21 2972.44,3818.9 2795.28,3818.9 2775.59,3838.58
  region net GND: 3169.29,3149.61 3149.61,3129.92 3031.5,3129.92 3011.81,3110.24 3011.81,2775.59 3031.5,2755.91 3897.64,2755.91 3917.32,2775.59 3917.32,2913.39 3897.64,2933.07 3405.51,2933.07 3385.83,2952.76 3385.83,3523.62 3375.98,3543.31 2755.91,3543.31 2736.22,3562.99 2736.22,4133.86 2716.54,4153.54 2559.06,4153.54 2539.37,4133.86 2539.37,3385.83 2559.06,3366.14 3149.61,3366.14 3169.29,3346.46
  region net IPT_IN1: 2047.24,4094.49 2027.56,4114.17 1535.43,4114.17 1496.06,4153.54 1318.9,4153.54 1299.21,4133.86 1299.21,3976.38 1318.9,3956.69 2027.56,3956.69 2047.24,3976.38
  region net IPT_IN2: 1318.9,4192.91 1496.06,4192.91 1535.43,4232.28 2027.56,4232.28 2047.24,4251.97 2047.24,4370.08 2027.56,4389.76 1338.58,4389.76 1299.21,4350.39 1299.21,4212.6

## Silkscreen, mask and mechanical layers (free items; w line width, h text height)
Mechanical 1:
  the board outline again, w10

## Text inside footprints (layer, text, board x,y; h text height)
E1: Top Overlay "A1" at 1358.46,4480.39 h59.06 r270